# Altium PCB PCB10.PcbDoc
Units mil, origin at the board's own origin, x right, y up, seen from the top; angles counter-clockwise.
Board outline 6000 x 4000 mil, 2 copper layers (Top Layer, Bottom Layer); 45 components, 30 nets, 128 pads, 26 vias.
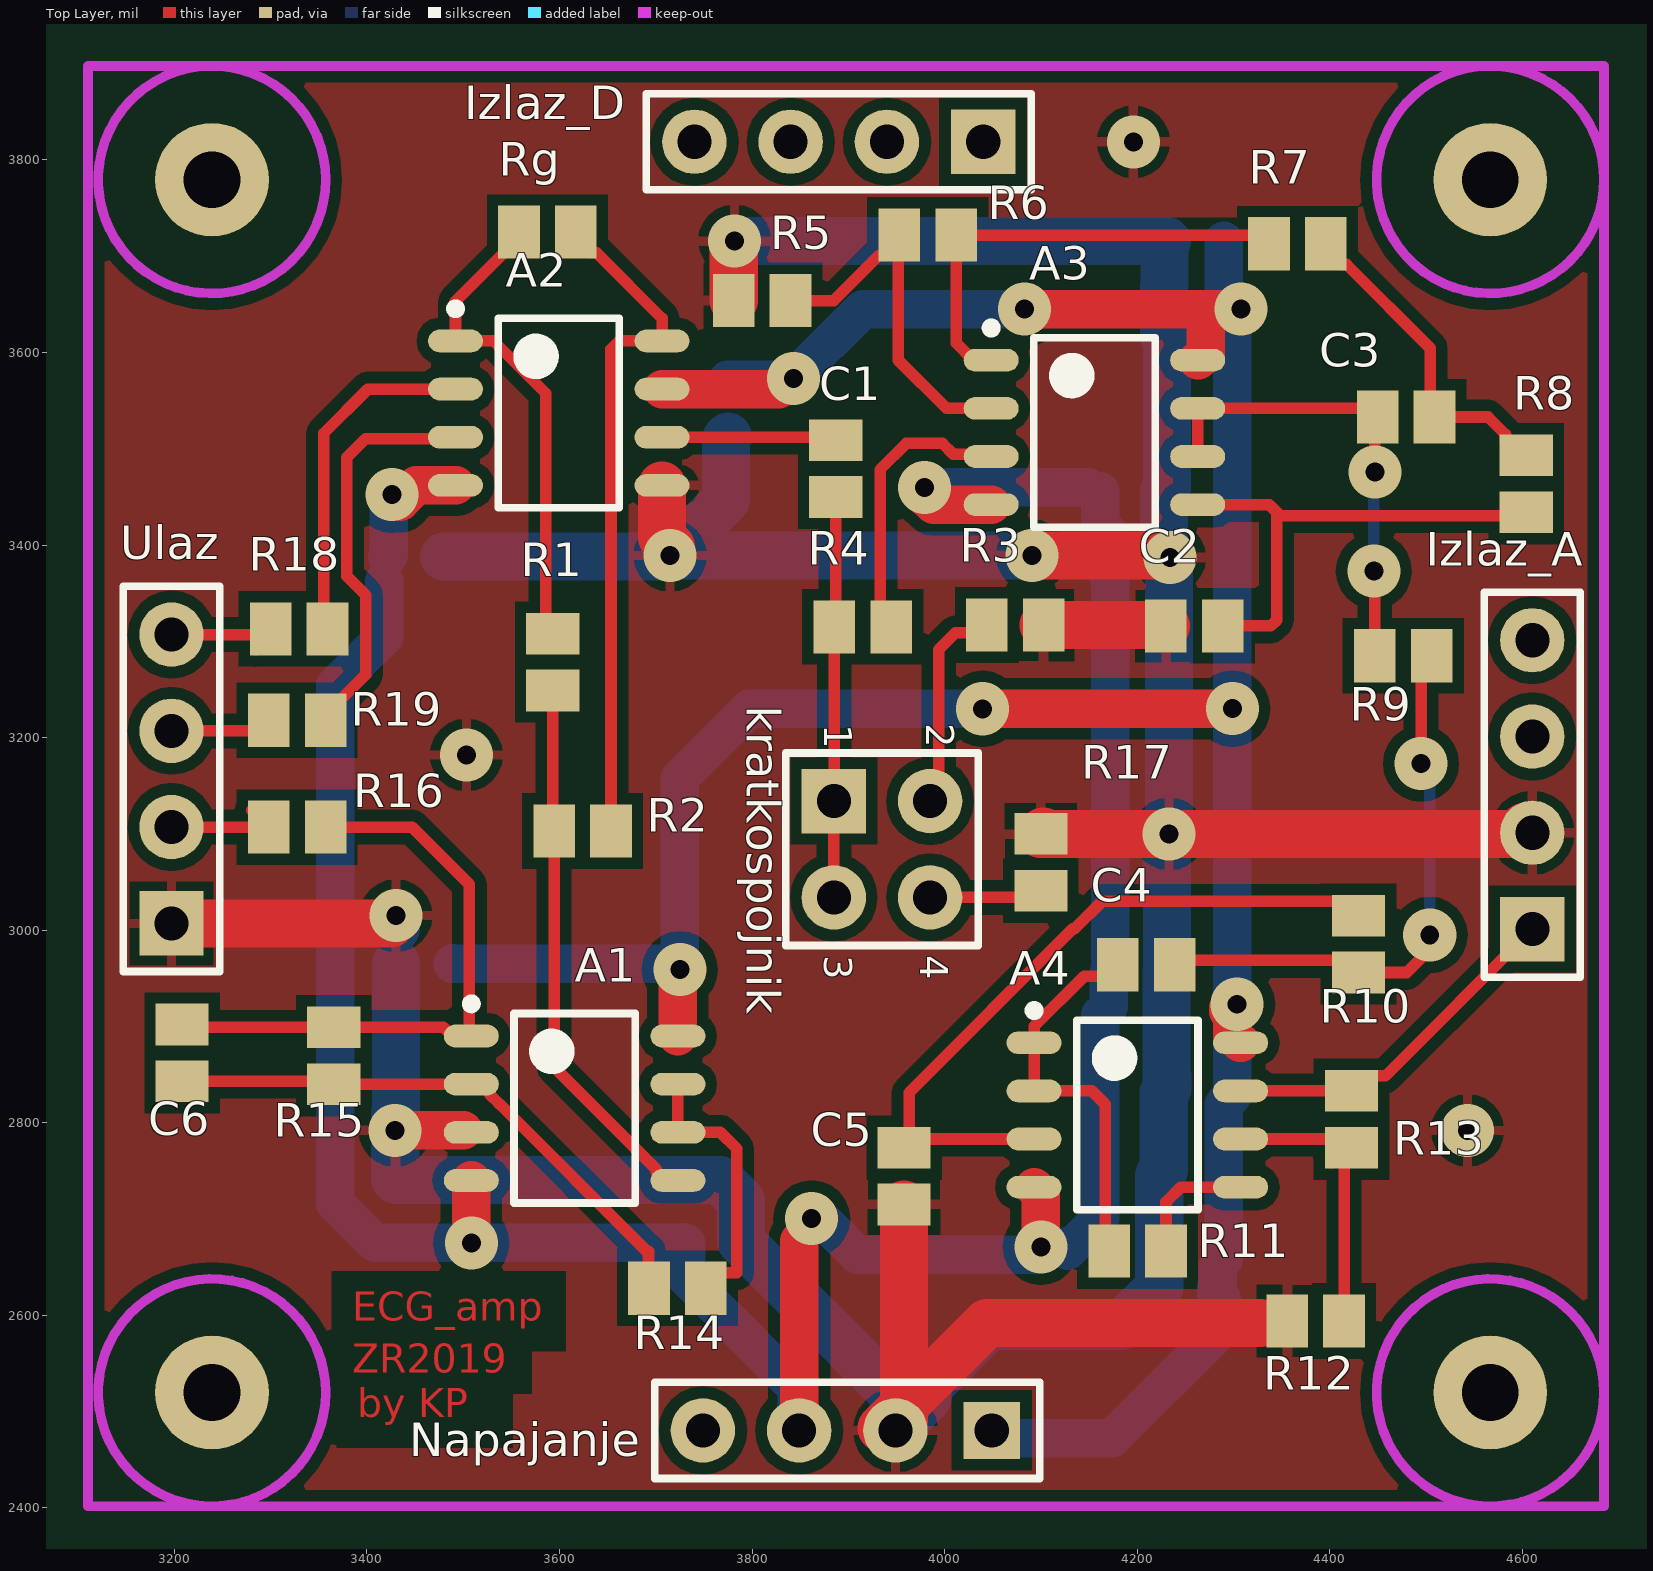
[diagram p0: Top Layer view]
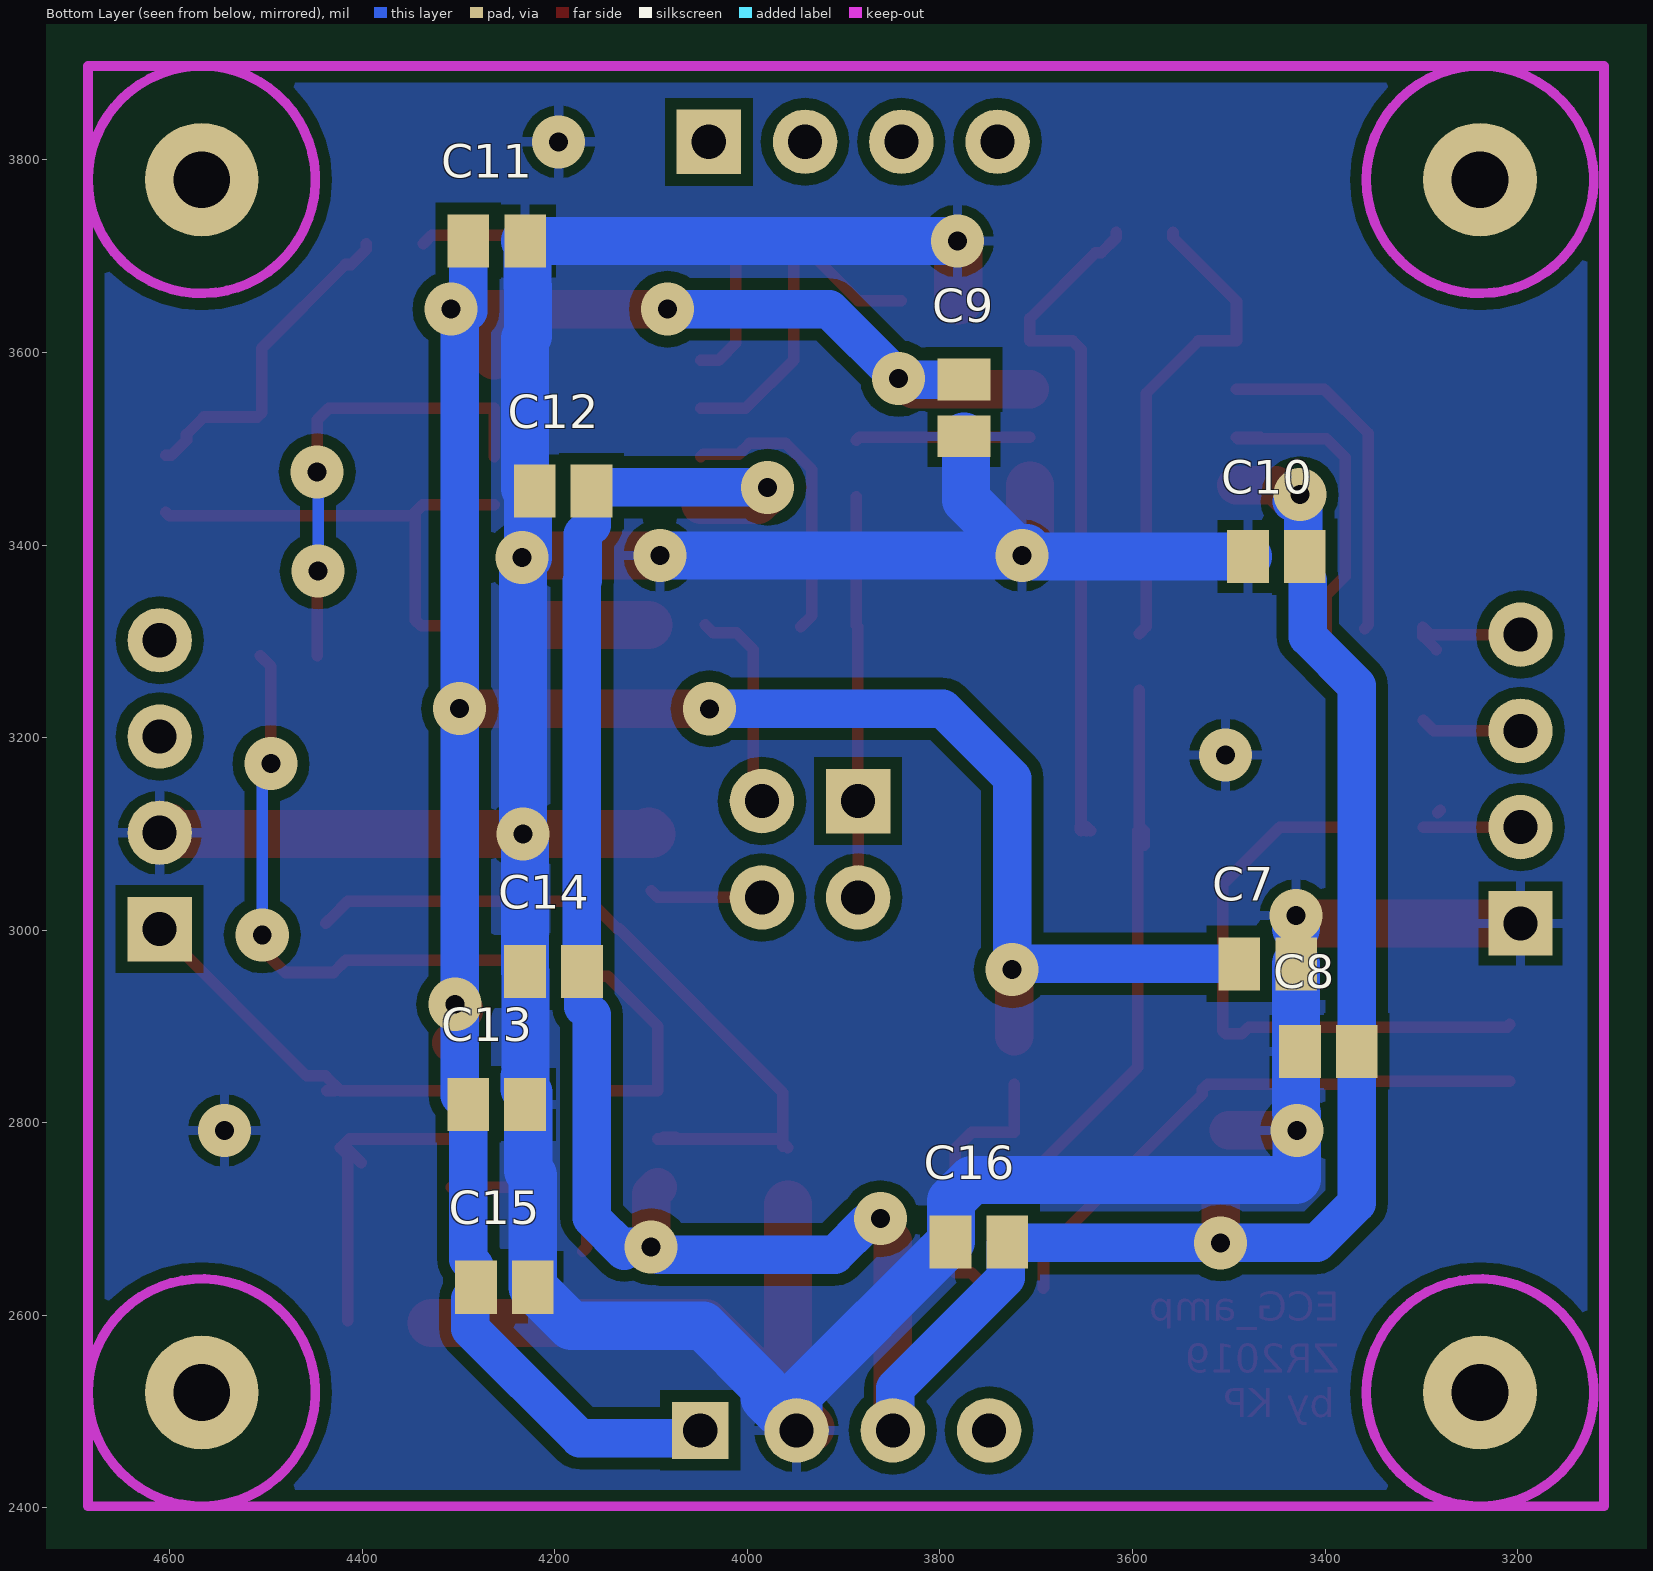
[diagram p1: Bottom Layer view, seen from below]

## Layer stack, top to bottom
Top Solder: solder mask 0.4, Solder Resist, Dk 3.5
Top Layer: signal copper 1.4
Dielectric 1: dielectric 12.6, FR-4, Dk 4.8
Bottom Layer: signal copper 1.4
Bottom Solder: solder mask 0.4, Solder Resist, Dk 3.5

## Board outline
1000,1000 7000,1000 7000,5000 1000,5000

## Design rules (kind name [scope] priority, off if disabled: settings)
Clearance [All] p1: gap=12 ignorepadtopadclearanceinfootprint=FALSE
HoleSize [All] p1: absolutevalues=TRUE maxlimit=125.98 minlimit=1 maxpercent=80.000 minpercent=20.000
MinimumSolderMaskSliver [All] p1: minsoldermaskwidth=4
PolygonConnect [All] p1: connectstyle=Relief reliefconductorwidth=10 reliefentries=4 polygonreliefangle="90 Angle" airgapwidth=10
RoutingVias [All] p1: holewidth=28 width=50 viastyle="Through Hole" minholewidth=28 minwidth=50 maxholewidth=28 maxwidth=50
SilkToSolderMaskClearance [IsPad] p1: minsilkscreentomaskgap=4 clearancetoexposedcopper=TRUE
SolderMaskExpansion [All] p1: expansion=4
Width [All] p1: maxlimit=60 minlimit=12 preferedwidth=12 minimp=50.000000 maximp=50.000000 favimp=50.000000
27 further rules are at their usual default settings.

## Classes and differential pairs
component class "shema_projekt kor4": A1 A2 A3 A4 C1 C2 C3 C4 C5 C6 Izlaz_A Izlaz_D kratkospojnik R1 R2 R3 R4 R5 R6 R7 R8 R9 R10 R11 R12 R13 R14 R15 R16 R17 R18 Rg Ulaz
component class napajanje: C7 C8 C9 C10 C11 C12 C13 C14 C15 C16 Napajanje

## Components (designator, comment, footprint, x,y, rotation, side; value= is the part's Value field where it differs from the comment)
A1 "MC33172" SOIC127P600X175-8N 4259.42,2365 r0 top
A2 "INA 118" SOIC127P600X175-8N 4242.98,3087 r0 top
A3 "OPA2277" SOIC127P600X175-8N 4799.42,3067 r0 top
A4 "OPA2277" SOIC127P600X175-8N 4843.98,2358 r0 top
C1 "3,3u" C0805 3887,3479.47 r270 top value=100pF
C2 "68n" C0805 4259.47,3316 r180 top value=100pF
C3 "470n" C0805 4479.47,3533 r0 top value=100pF
C4 "82nF" C0805 4209.53,2964 r180 top value=100pF
C5 "68n" C0805 3958,2744.53 r270 top value=100pF
C6 "68n" C0805 3208,2872.47 r270 top value=100pF
C7 "100n" C0805 3459.53,2965 r0 bottom value=100pF
C8 "100n" C0805 3396.47,2874.02 r0 bottom value=100pF
C9 "100n" C0805 3775,3542.42 r90 bottom value=100pF
C10 "100n" C0805 3450.47,3388 r0 bottom value=100pF
C11 "100n" C0805 4260.47,3716 r0 bottom value=100pF
C12 "100n" C0805 4191.47,3456 r0 bottom value=100pF
C13 "100n" C0805 4260.53,2819 r0 bottom value=100pF
C14 "100n" C0805 4201.47,2957 r0 bottom value=100pF
C15 "1u" C0805 4252.53,2629 r180 bottom
C16 "1u" C0805 3759.53,2676 r180 bottom
Izlaz_A "Input" HDR1X4#1 4610.56,3001.09 r90 top (schematic designator X2)
Izlaz_D "Input" HDR1X4#1 4040.16,3818.9 r180 top (schematic designator X3)
kratkospojnik "kratkospojnik" HDR2X2 3885,3134 r270 top (schematic designator jumper)
Napajanje "Input" HDR1X4#2 4049,2480.32 r180 top (schematic designator X4)
R1 "866k" C0805 3593,3278.47 r90 top value=1K
R2 "866k" C0805 3624,3103 r180 top value=1K
R3 "1M" C0805 4073.53,3317 r0 top value=1K
R4 "1k" C0805 3915,3315 r0 top value=1K
R5 "1k" C0805 3810.53,3654 r0 top value=1K
R6 "9k" C0805 3982.53,3722 r0 top value=1K
R7 "5k23" C0805 4366.47,3713 r0 top value=1K
R8 "6k65" C0805 4604.26,3463.74 r90 top value=1K
R9 "11k8" C0805 4476.47,3285 r180 top value=1K
R10 "16k9" C0805 4430,2985.53 r90 top value=1K
R11 "1k" C0805 4200.53,2666.53 r0 top value=1K
R12 "1k" C0805 4385.47,2594 r180 top value=1K
R13 "19k" C0805 4422.81,2803.47 r90 top value=1K
R14 "12k7" C0805 3722.47,2628 r0 top value=1K
R15 "866k" C0805 3365.53,2869.53 r270 top value=1K
R16 "499k" C0805 3327.53,3107 r180 top value=1K
R17 "100k" C0805 4100,3070.47 r90 top value=1K
R18 "100k" C0805 3329.47,3313 r180 top value=1K
R19 "100k" C0805 3327.53,3218 r0 top value=1K
Rg "12k5" C0805 3587.47,3725 r0 top value=1K
Ulaz "Input" HDR1X4#1 3196.98,3007 r90 top (schematic designator Input)

## Footprints (in the part's own frame and the unit in brackets; to place one, negate y for a bottom-side part, rotate by r counter-clockwise, add the part's x,y. Pads: shape width x height; smd on the part's side, far side on the other; paste and mask are expansions set on the pad)
C0805 [mm] "Chip Capacitor, Body 2.0x1.3mm, IPC High Density"
  rect 1.1x1.4 smd: 1(-0.75,0) 2(0.75,0)
  body extent -1.1,-0.72 1.1,0.72, height 1.4
HDR1X4#1 [mm] "Connector; Header; 4 Position"
  rect 1.7x1.7 hole 0.9: 1(0,0)
  round 1.7 hole 0.9: 2(2.54,0) 3(5.08,0) 4(7.62,0)
  silkscreen extent -1.27,-1.27 8.89,1.27
HDR1X4#2 [mm] "Connector; Header; 4 Position"
  rect 1.5x1.5 hole 0.9: 1(0,0)
  round 1.7 hole 0.9: 2(2.54,0) 3(5.08,0) 4(7.62,0)
  silkscreen extent -1.27,-1.27 8.89,1.27
HDR2X2 [mm] "Connector; Header; 2x2 Position"
  rect 1.7x1.7 hole 0.9: 1(0,0)
  round 1.7 hole 0.9: 2(0,2.54) 3(2.54,0) 4(2.54,2.54)
  silkscreen extent -1.27,-1.27 3.81,3.81
SOIC127P600X175-8N [mm] "SOIC, 8-Leads, Body 4,90x3,90mm, Pitch 1,27mm, IPC Medium Density"
  oval 1.45x0.6 smd: 1(-19.075,13.335) 2(-19.075,12.065) 3(-19.075,10.795) 4(-19.075,9.525) 5(-13.625,9.525) 6(-13.625,10.795) 7(-13.625,12.065) 8(-13.625,13.335)
  silkscreen extent -19.2,8.93 -14.75,14.31, body extent -19.35,8.93 -13.35,13.93, height 1.75

## Part data
A1: library part OPA2333, Cijena [L]=0.864, Kat.broj=2844927
A2: library part "INA 333", Cijena [L]=3.64, Kat.broj=2507235
C1 C2 C3 C4 C5 C6 C7 C8 C9 C10 C11 C12 C13 C14: library part Cap, "Capacitor", LatestRevisionDate=17-Jul-2002, LatestRevisionNote="Re-released for DXP Platform.", PackageDescription="Radial Cap, Thru-Hole; 2 Leads; 0.3 in Pin Spacing", PackageReference=RAD-0.3, Published=8-Jun-2000, Publisher="Altium Limited"
  C1: Cijena [L]=0.308, Kat.broj=1759412
  C2 C5 C6: Cijena [L]=0.0442, Kat.broj=1759262
  C3: Cijena [L]=0.112, Kat.broj=1759148
  C4: Cijena [L]=0.0651, Kat.broj=1759264
  C7 C8 C9 C10 C11 C12 C13 C14: Cijena [L]=0.146, Kat.broj=1301717
C15 C16: library part elko, Cijena [L]=0,521, Kat.broj=1658211
Izlaz_A Izlaz_D Napajanje Ulaz: library part "Header 4H", "Header, 4-Pin, Right Angle", Cijena [L]=1.38, Kat.broj=2554950, LatestRevisionDate=17-Jul-2002, LatestRevisionNote="Re-released for DXP Platform.", Publisher="Altium Limited"
kratkospojnik: library part "Header 2X2", "Header, 2-Pin, Dual row", LatestRevisionDate=17-Jul-2002, LatestRevisionNote="Re-released for DXP Platform.", Publisher="Altium Limited"
R1 R2 R3 R4 R5 R6 R7 R8 R9 R10 R11 R12 R13 R14 R15 R16 R17 R18 R19 Rg: library part Res2, "Resistor", LatestRevisionDate=17-Jul-2002, LatestRevisionNote="Re-released for DXP Platform.", PackageDescription="Axial Device, Thru-Hole; 2 Leads; 0.4 in Pin Spacing", PackageReference=AXIAL-0.4, Published=8-Jun-2000, Publisher="Altium Limited"
  R1 R2 R15: Cijena [L]=0.0081, Kat.broj=2447731
  R3: Cijena [L]=0.034, Kat.broj=1576507
  R4 R5 R11 R12: Cijena [L]=0.0046, Kat.broj=2688819
  R6: Cijena [L]=0.36, Kat.broj=1160198
  R7: Cijena [L]=0.0718, Kat.broj=2312278
  R8: Cijena [L]=0.0349, Kat.broj=2138965
  R9: Cijena [L]=0.0268, Kat.broj=2138981
  R10: Cijena [L]=0.026, Kat.broj=1652926
  R13: Cijena [L]=0.026, Kat.broj=1692532
  R14: Cijena [L]=0.026, Kat.broj=1469868
  R16: Cijena [L]=0.0264, Kat.broj=1653008
  R17: Cijena [L]=0.0015, Kat.broj=2446868
  R18 R19: Cijena [L]=0.0264, Kat.broj=1469860RL
  Rg: Cijena [L]=0.0138, Kat.broj=1469867
A3 A4: Cijena [L]=3.69, Kat.broj=1234768

## Free pads (board coordinates)
  round 118.11 hole 59.06: 0(3239,2519.68) 0(3239,3779.53) 0(4566.93,2519.68) 0(4566.93,3779.53)

## Via types
v1: diameter 55.12, hole 19.68, Top Layer to Bottom Layer, 26 vias

## Nets (pads, with @x,y where several pads share a name; then routed paths per layer and width w, separated by ;. In a path a pad name is that pad's centre, name@x,y a point inside that pad or via, vN(x,y) a via of type N, cw(c..) or ccw(c..) an arc to the next point about the centre after c; other vN are vias at no path point)
AGND: A1.3 A2.5 C2.2 C5.2 C7.1 C8.2 C9.1 C10.2 C11.1 C12.2 C13.1 C14.2 C15.2 C16.1 Izlaz_A.2 Napajanje.2 R3.2 R5.1 R12.2 R17.2 Ulaz.1 | length 5499.1
  Top Layer w40: v1(3429.35,2792) A1.3@3499.89,2792
  Top Layer w50: Ulaz.1 3424.35,3007 3430,3012.65 v1(3430,3015) ; A2.5 3706.57,3407.82 3716,3398.39 3715,3397.39 v1(3715,3389) ; R5.1 3781,3715 v1(3782,3716) ; Napajanje.2 Napajanje.2@3949,2480.66 ; C5.2 Napajanje.2@3958,2506 ; v1(4091,3389) 4232,3389 v1(4234,3387) ; R17.2@4102.56,3102.56 R17.2 v1(4233.31,3100) 4595.2,3100 4602.2,3107 4608.11,3101.09 Izlaz_A.2 ; R3.2 4228.94,3317 C2.2 ; 4328,2592 4044,2592 Napajanje.2@3958,2506 ; Napajanje.2@3958,2506 3934.77,2482.77 3949,2482.77 3958,2491.77 Napajanje.2@3958,2506
  Bottom Layer w50: C7.1 3430,2874.02 3430,2810.35 3429.35,2809.69 v1(3429.35,2792) 3429.35,2741.61 3430.4,2740.56 3766.98,2740.56 3788.65,2718.89 3788.65,2676.4 C16.1 3947.27,2517.79 3947.27,2482.05 Napajanje.2 3949,2480.66 3982.47,2514.13 3982.47,2525.17 4046.3,2589 4183,2589 C15.2 4223,2745.39 4227.65,2750.04 4227.65,2819 C13.1@4227.65,2831.3 ; v1@3430,3002 v1(3430,3015) ; C10.2 3701,3388 3710,3397 3715,3392 v1(3715,3389) ; C9.1 3772.81,3510.7 3772.81,3446.81 v1(3715,3389) ; v1@3782,3714.61 v1(3782,3716) ; v1@3789,3716 C11.1 4228.39,3713.44 4228.39,3669.01 4228.06,3668.68 4228.06,3617.32 4230.94,3614.43 4230.94,3458.89 4228.06,3456 4228.06,3387 4233.31,3381.75 4233.31,3102.31 4231,3100 C14.2 4230.6,2956.6 4230.6,2834.25 4231.4,2835.05 4231.4,2848 ; v1(4091,3389) v1(3715,3389)
  other v1: 4543.33,2792 3503.24,3181.96 4196.08,3818.9
NetA1_1: A1.1 C6.1 R15.1 R16.1 | length 629.9
  Top Layer w12: C6.1 3210.94,2899.06 R15.1 3479.5,2899.06 3486.33,2892.22 3503.24,2892.22 3506.39,2895.37 3506.39,3047.61 3447,3107 R16.1
NetA1_2: A1.2 C6.2 R14.1 R15.2 | length 599.2
  Top Layer w12: C6.2 3362.58,2842.94 R15.2 A1.2 3522.02,2840 3527.39,2834.63 3527.39,2829.62 3537.19,2819.81 3537.51,2819.81 3690.79,2666.53 3692.47,2666.53 3692.47,2628.47 R14.1
NetA1_5: A1.5 R1.1 R2.2 | length 582.6
  Top Layer w12: R2.2@3587.94,3088 R2.2@3587.94,3103 ; R2.2@3591.21,3106.26 3593,3108.05 R1.1 ; R2.2 3594.47,2857.53 3700.46,2751.54 3700.46,2748.96 3709.41,2740 A1.5
NetA1_6: A1.6 A1.7 R14.2 | length 285.9
  Top Layer w12: A1.7 A1.6 3767.06,2790 3784,2773.06 3784,2643.93 3767.65,2643.93 3752,2628.28 R14.2
NetA2_1: A2.1 R1.2 Rg.1 | length 509.3
  Top Layer w12: Rg.1 3557.94,3719.09 3492,3653.15 A2.1 3531.5,3612 3585.97,3557.52 3585.97,3315.03 R1.2
NetA2_2: A2.2 R18.1 | length 360.8
  Top Layer w12: R18.1 3354.94,3317.06 3354.94,3515.94 3401,3562 A2.2
NetA2_3: A2.3 R19.2 | length 444.7
  Top Layer w12: R19.2 3357.06,3223.91 3398.65,3265.5 3398.65,3348.09 3378.94,3367.8 3378.94,3490.94 3398.59,3510.59 3490.59,3510.59 A2.3 A2.3@3467.37,3512
NetA2_6: A2.6 C1.1 | length 181.7
  Top Layer w12: A2.6 3884,3512 C1.1
NetA2_8: A2.8 R2.1 Rg.2 | length 727.6
  Top Layer w12: Rg.2 3617,3719.09 3632.65,3703.44 3638.56,3703.44 3706.57,3635.43 A2.8 3661.98,3612 3653.53,3603.55 R2.1 3654.53,3104 R2.1@3654.53,3108 ; R2.1@3643.53,3103 R2.1@3648,3107.47 ; R2.1@3648,3103 R2.1@3648,3107.47 ; R2.1@3648.53,3108 R2.1@3648,3107.47
NetA3_1: A3.1 R6.2 R7.1 | length 484.5
  Top Layer w12: A3.1 4029.93,3592 4012.06,3609.88 R6.2 4327.94,3722 R7.1
NetA3_2: A3.2 R5.2 R6.1 | length 390.7
  Top Layer w12: R5.2 3885,3654 3931.44,3700.44 3937.35,3700.44 R6.1@3952.03,3715.12 ; R6.1@3953,3716.09 R6.1 3952.03,3721.03 R6.1@3952.03,3715.12 ; A3.2 4002.03,3542 3952.03,3592 R6.1@3952.03,3715.12
NetA3_3: A3.3 R4.2 | length 300.5
  Top Layer w12: R4.2 3933,3326.53 3933,3478.43 3960.13,3505.56 3997.87,3505.56 4009.21,3494.22 4046.21,3494.22 A3.3
NetA3_5: A3.5 C2.1 R8.1 | length 518.3
  Top Layer w12: A3.5 4337.21,3442 4345,3434.21 ; C2.1 4338.97,3316 4345,3322.03 4345,3434.21 ; R8.1 4600.5,3430.44 4348.77,3430.44 4345,3434.21
NetA3_6: A3.6 A3.7 C3.1 R9.2 | length 514.7
  Top Layer w12: A3.6 A3.7 4435.06,3542 4447,3530.06 v1(4447,3476) ; v1(4446,3373) 4446,3387 4446.94,3387.94 R9.2
  Bottom Layer w12: v1(4446,3373) 4446,3475 v1(4447,3476)
NetA4_1: A4.1 A4.2 C4.2 R11.1 | length 408.4
  Top Layer w12: R11.1 4167,2670.53 4167,2819 4153,2833 A4.2 A4.1 4093,2900 4145,2952 C4.2@4178.94,2952
NetA4_3: A4.3 C5.1 R10.2 | length 776.1
  Top Layer w12: C5.1 C5.1@3963.15,2779.21 ; C5.1@3963.15,2775.59 C5.1@3963.15,2779.21 ; A4.3@4087.48,2784.63 4074.75,2784.63 A4.3@4073.12,2783 ; A4.3 A4.3@4073.12,2783 ; R10.2@4438.06,3007 R10.2 4415.06,3030 4163.72,3030 4135.01,3001.29 4133.29,3001.29 3963.15,2831.15 C5.1@3963.15,2779.21 ; C5.1@3963.15,2779.21 3966.94,2783 A4.3@4073.12,2783
NetA4_5: A4.5 R11.2 | length 134.9
  Top Layer w12: R11.2 4230.06,2717.57 4245.48,2733 A4.5
NetA4_6: A4.6 R12.1 R13.1 | length 324.3
  Top Layer w12: A4.6 4413.76,2783 R13.1 4415,2766.13 R12.1 ; R13.1@4401.25,2758.29 R13.1@4416.91,2773.94
NetA4_7: A4.7 Izlaz_A.1 R13.2 | length 380.7
  Top Layer w12: A4.7 R13.2 4438.32,2848.51 4457.97,2848.51 Izlaz_A.1 ; R13.2@4428.72,2833 R13.2@4436.81,2833
NetC1_2: C1.2 kratkospojnik.1 kratkospojnik.3 R4.1 | length 416.8
  Top Layer w12: kratkospojnik.3 kratkospojnik.1 3885.47,3134.47 R4.1 3887,3316.53 C1.2
NetC3_2: C3.2 R7.2 R8.2 | length 345.4
  Top Layer w12: R7.2 4396,3707.09 4411.65,3691.44 4417.56,3691.44 4504.47,3604.53 4504.47,3537.53 C3.2 4564.53,3533 4582.7,3514.82 4582.7,3508.92 4598.36,3493.26 R8.2
NetC4_1: C4.1 R9.1 R10.1 | length 600.9
  Top Layer w12: C4.1@4243.06,2968 C4.1 4243.61,2968.56 4417.44,2968.56 R10.1 4480,2956 4504,2980 v1(4504,2995) ; v1(4495,3173) 4495,3274 R9.1
  Bottom Layer w12: v1(4495,3173) 4504,3164 v1(4504,2995)
NetInput_2: R16.2 Ulaz.2 | length 104.6
  Top Layer w12: Ulaz.2 R16.2 ; R16.2@3280.5,3124.5 R16.2@3283,3122
NetInput_3: R19.1 Ulaz.3 | length 105.6
  Top Layer w12: Ulaz.3 3287,3207 R19.1
NetInput_4: R18.2 Ulaz.4 | length 146.2
  Top Layer w12: Ulaz.4@3205.98,3316 Ulaz.4 3290.64,3307 3298.29,3314.65 3298.29,3305.44 R18.2@3284.29,3291.44
Netjumper_2: kratkospojnik.2 R3.1 | length 221.8
  Top Layer w12: kratkospojnik.2 3994,3143 3994,3291.44 4011.38,3308.82 4035.82,3308.82 R3.1
Netjumper_4: kratkospojnik.4 R17.1 | length 117.9
  Top Layer w12: kratkospojnik.4 4093.06,3034 R17.1
VCC+: A1.8 A2.7 A3.8 A4.8 C7.2 C9.2 C11.2 C13.2 C15.1 Napajanje.1 | length 3359.8
  Top Layer w40: A2.7 3827.91,3562 3838.91,3573 v1(3843,3573) ; A1.8 3723,2957 v1(3725,2959) ; v1(4039.55,3229.93) 4298.93,3229.93 v1(4299,3230) v1@4296.29,3230 ; v1(4083,3645) 4085,3643 4087,3645 v1(4308,3645) ; A3.8 4263.35,3592 4271.54,3600.19 4271.54,3621.78 ; v1(4304,2923) 4298.83,2923 4294.91,2919.09 4294.91,2915.56 4299.02,2911.45 4299.02,2891.19 4307.21,2883 A4.8
  Bottom Layer w40: C7.2@3489.56,2965.5 C7.2 3719,2965 v1(3725,2959) 3725,3158 3796.93,3229.93 v1(4039.55,3229.93) ; C9.2 3841.94,3571.94 v1(3843,3573) 3915,3645 v1(4083,3645) ; Napajanje.1 4057.32,2472 4174,2472 4288,2586 4288,2617.15 4282.06,2623.09 C15.1 4283.71,2630.65 4283.71,2651.58 4290.06,2657.93 C13.2 4299,2827.94 v1(4299,3230) 4299,3634.06 4308,3643.06 v1(4308,3645) 4291.94,3645 4290,3643.06 C11.2
VCC-: A1.4 A2.4 A3.4 A4.4 C8.1 C10.1 C12.1 C14.1 C16.2 Napajanje.3 | length 3148.5
  Top Layer w40: v1@3427,3452.38 3434.38,3445 3451.38,3462 A2.4 ; v1(3508.43,2675) A1.4 ; Napajanje.3 v1@3849,2677.29 ; v1(3979,3460) v1@3979,3451.71 ; A3.4 3988.71,3442 v1@3981.71,3449 ; A4.4 4100,2726 v1(4100,2671) ; v1@3979,3451.71 3978.71,3452 3978,3451.29 3980.29,3449 v1@3981.71,3449 ; v1@3979,3451.71 v1@3981.71,3449
  Bottom Layer w40: C10.1@3418,3363.13 3418,3305 3366.94,3253.94 C8.1 3366.94,2716.54 3408.48,2675 v1(3508.43,2675) 3729,2675 C16.2 3731.65,2674.35 3731.65,2638.93 3846.33,2524.26 3846.33,2482.98 Napajanje.3 ; C10.1 3422.6,3389.65 3422.6,3444.88 3426,3448.29 v1(3426,3452.38) ; v1@3427,3452.38 v1@3434.38,3445 ; v1(3862,2700.29) 3862,2696.09 3875.98,2696.09 3909.07,2663 4092,2663 v1(4100,2671) 4124,2671 4128,2667 4162,2701 4162,2912 4170.65,2920.65 4170.65,2955.71 C14.1 4171.94,3362.5 4171.06,3363.39 4171.06,3411.48 4161.94,3420.59 C12.1@4161.94,3450.65 ; v1(3979,3460) 4149.29,3460 4160.29,3449 C12.1@4161.94,3450.65 ; C12.1 C12.1@4161.94,3450.65
pads on no net: Izlaz_A.3 Izlaz_A.4 Izlaz_D.1 Izlaz_D.2 Izlaz_D.3 Izlaz_D.4 Napajanje.4

## Polygon pours and split planes (outlines as drawn)
AGND on Bottom Layer "Bottom Layer-No Net" (solid, remove dead copper, pour order 8): 3073,3934 3077,3930 4725,3930 4725,2364 4721,2360 4711,2370 3069,2370 3069,3928 3073,3932
AGND on Top Layer "Top Layer-AGND" (solid, remove dead copper, pour order 6): 3110.24,3897.64 4680.43,3897.64 4680.43,2401.57 3110.24,2401.57

## Keep-outs
Keep-Out Layer:
  circle w10: c4566.93,2519.68 r118.11
  circle w10: c3239,2519.68 r118.11
  circle w10: c4566.93,3779.53 r118.11
  circle w10: c3239,3779.53 r118.11
  lines w10: 3110.24,2401.57 3110.24,3897.64 4685.04,3897.64 4685.04,2401.57 3110.24,2401.57

## Other copper
Top Layer:
  text "ECG_amp" at 3385,2594 h30
  text "ZR2019" at 3385,2540 h30
  text "by KP" at 3390,2494 h30

## Silkscreen, mask and mechanical layers (free items; w line width, h text height)
Mechanical 1:
  lines w10: 3070.87,2362.2 4724.41,2362.2 4724.41,3937.01 3070.87,3937.01 3070.87,2362.2
Drill Drawing:
  text ".Legend" at 4822.83,2401.57 h60

## Text inside footprints (layer, text, board x,y; h text height)
kratkospojnik: Top Overlay "3" at 3865,2974 h50 r270; Top Overlay "4" at 3965,2974 h50 r270; Top Overlay "2" at 3971,3215 h50 r270; Top Overlay "1" at 3865,3214 h50 r270